# Altium PCB WCAM-BREAKOUT-PCB-R01.PcbDoc (part 1 of 2)
Units mm, origin at the board's own origin, x right, y up, seen from the top; angles counter-clockwise.
Board outline 42.7 x 48.05 mm, 4 copper layers (Top Layer, Mid1, Mid2, Bottom Layer), stack 1.586 mm thick; 121 components, 86 nets, 382 pads, 183 vias.
Unrouted connection lines stored in the file: 147.
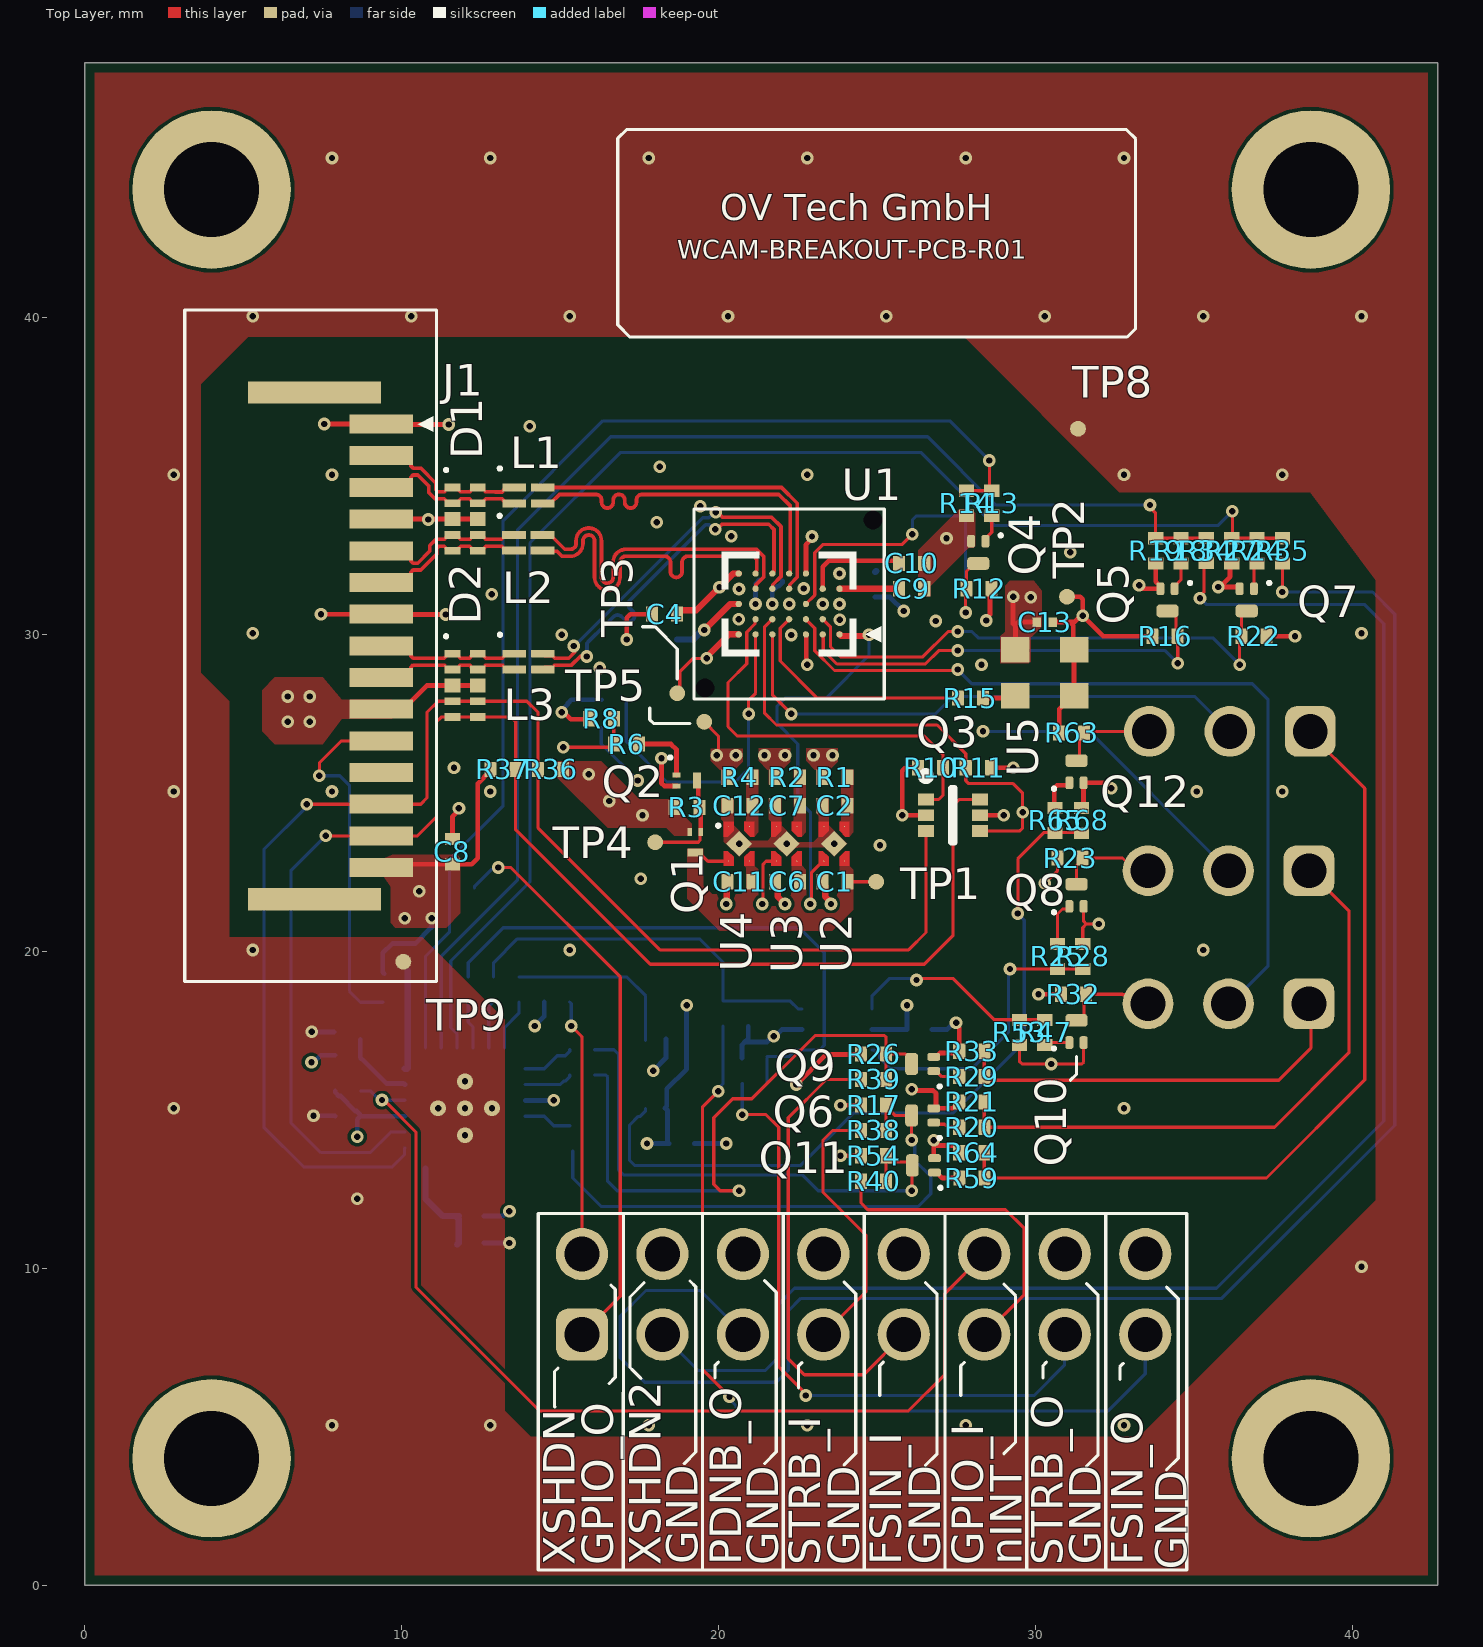
[diagram p0: Top Layer view]
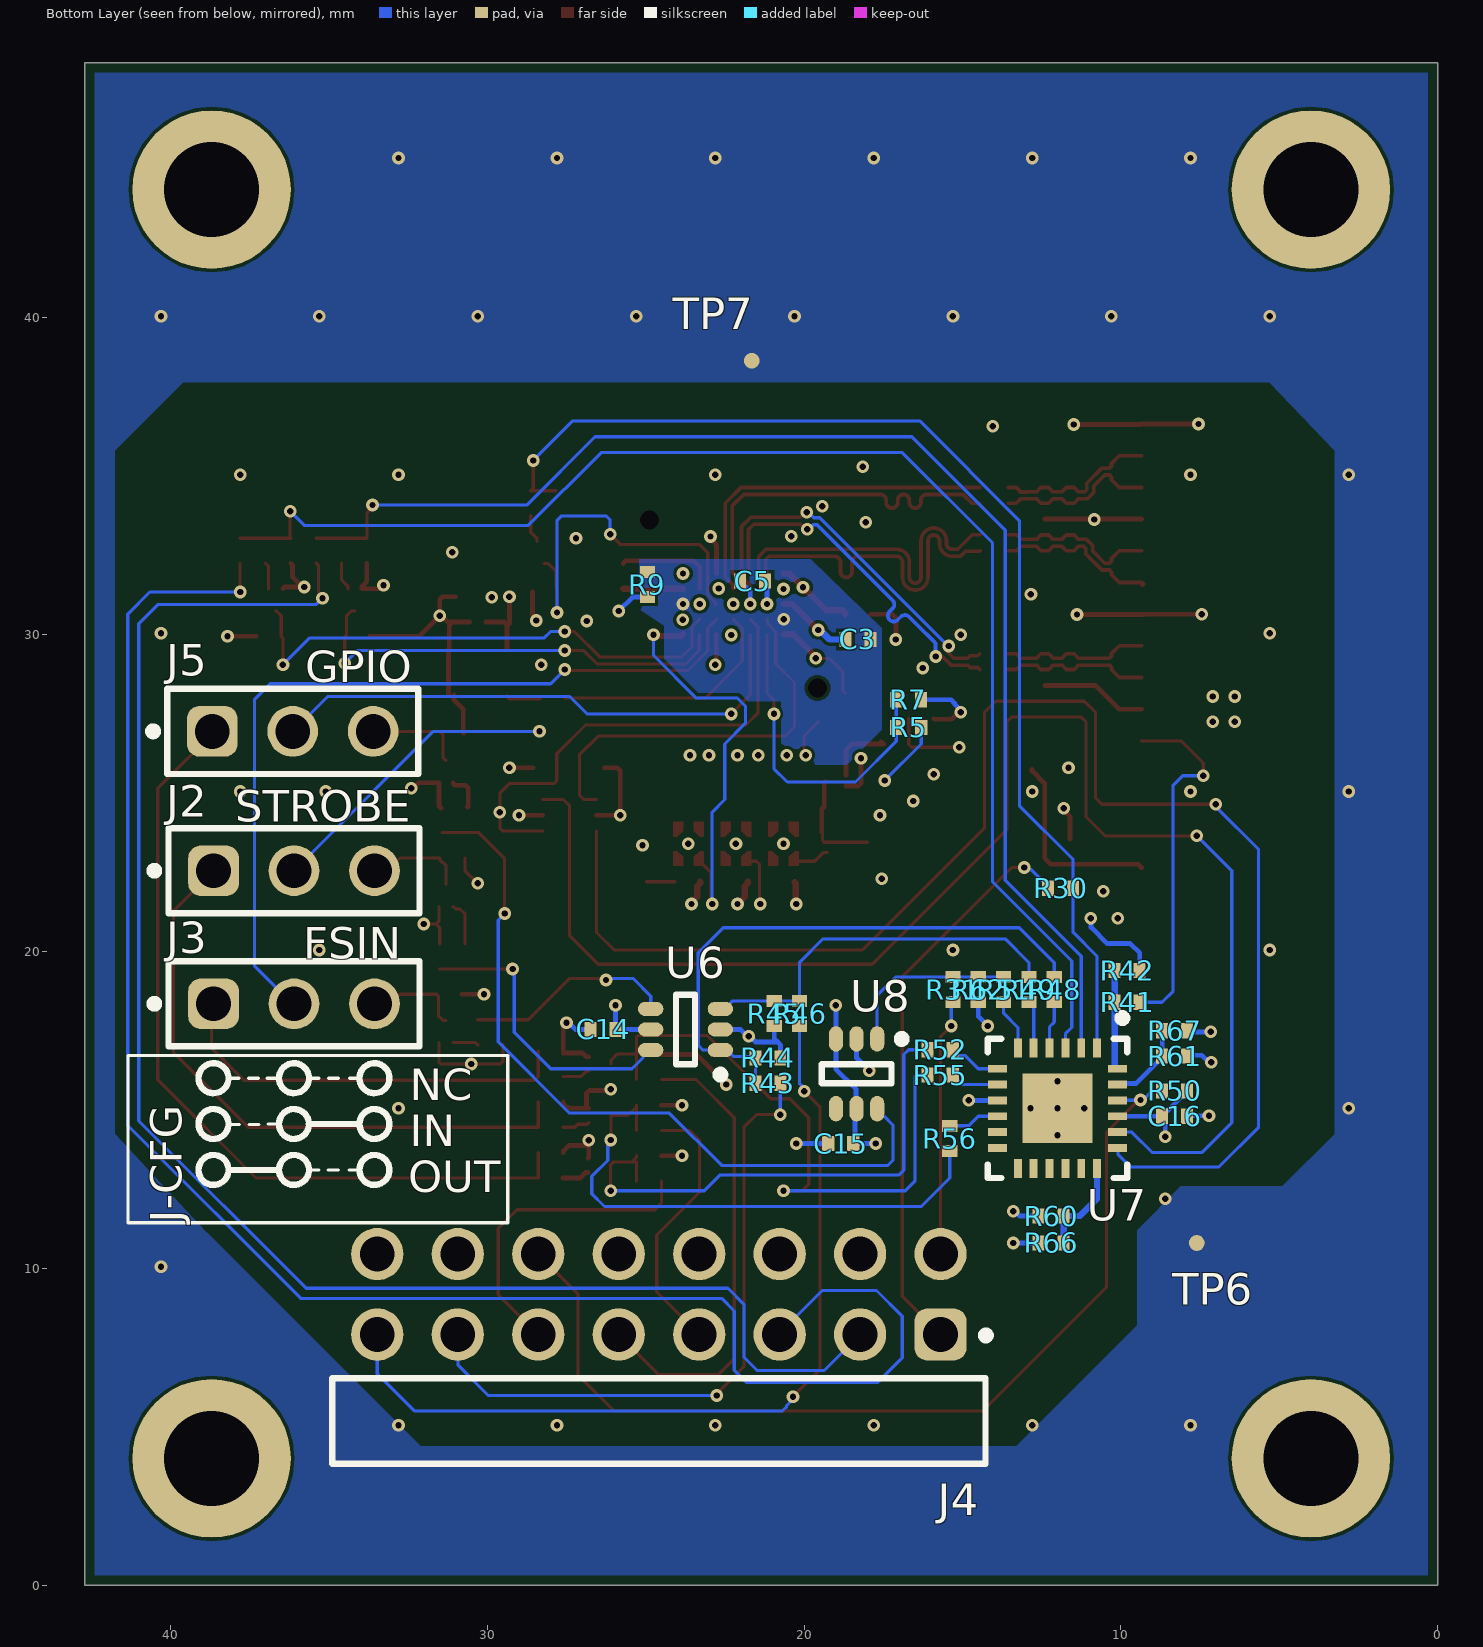
[diagram p1: Bottom Layer view, seen from below]
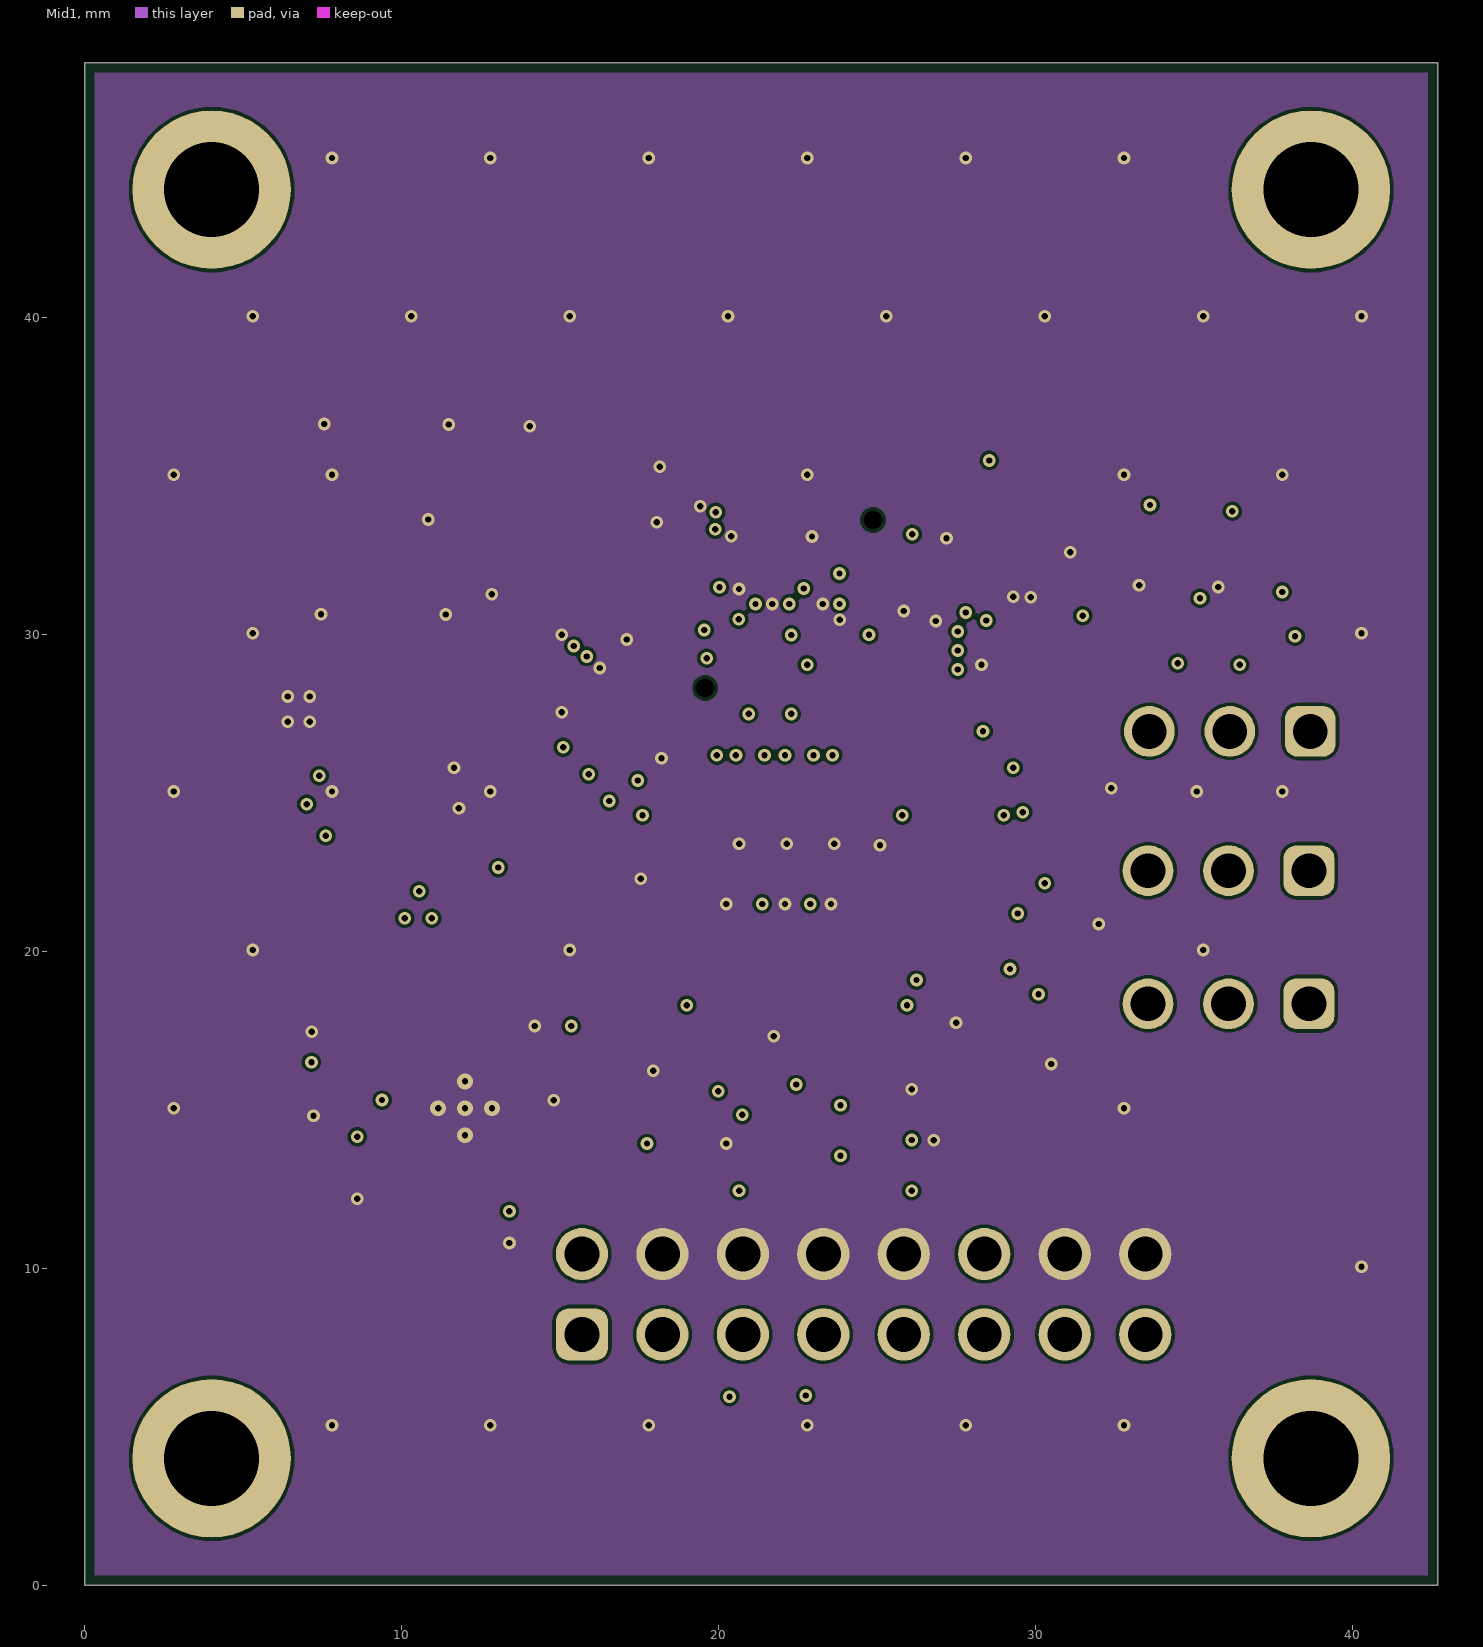
[diagram p2: Mid1]
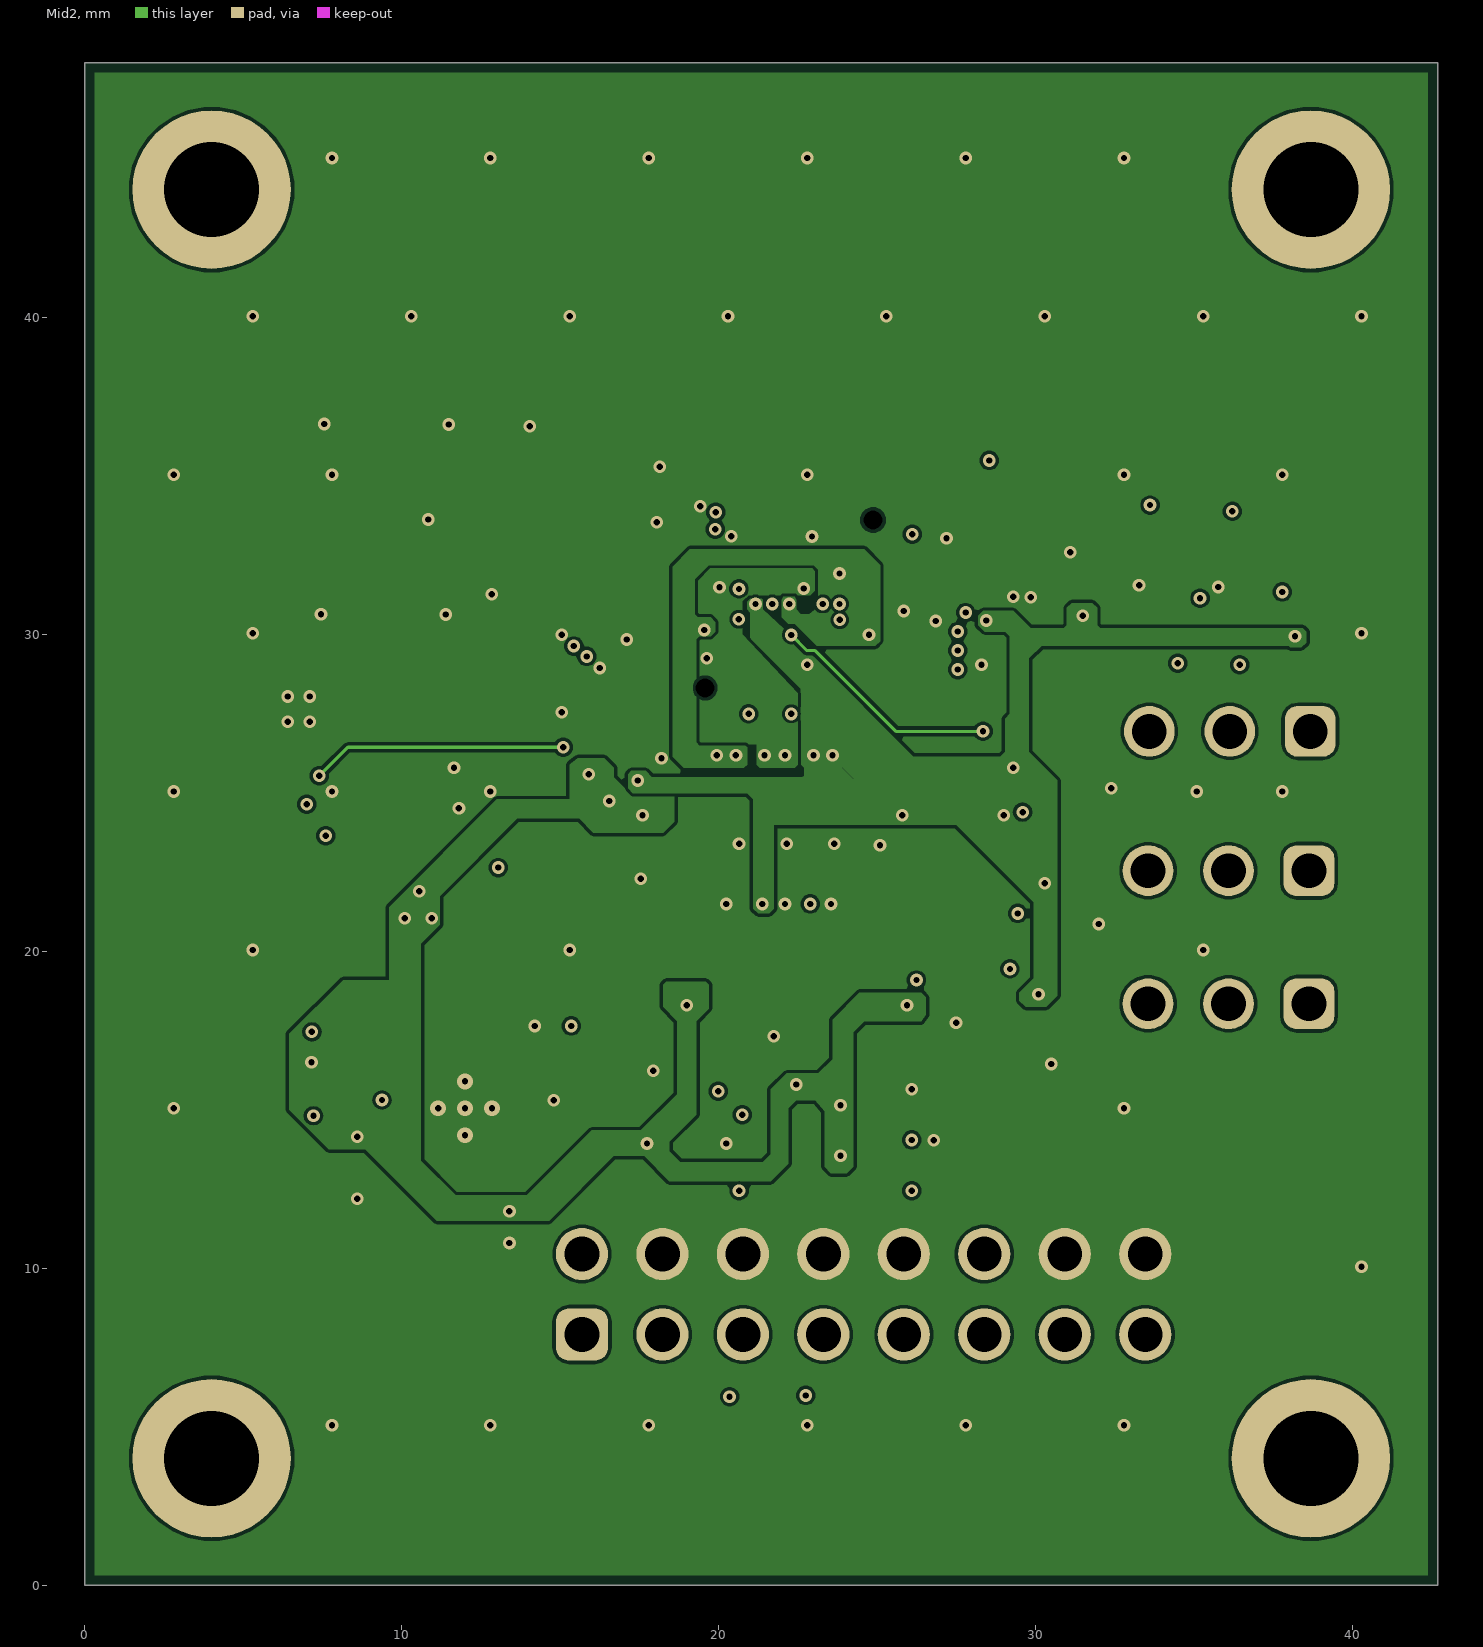
[diagram p3: Mid2]
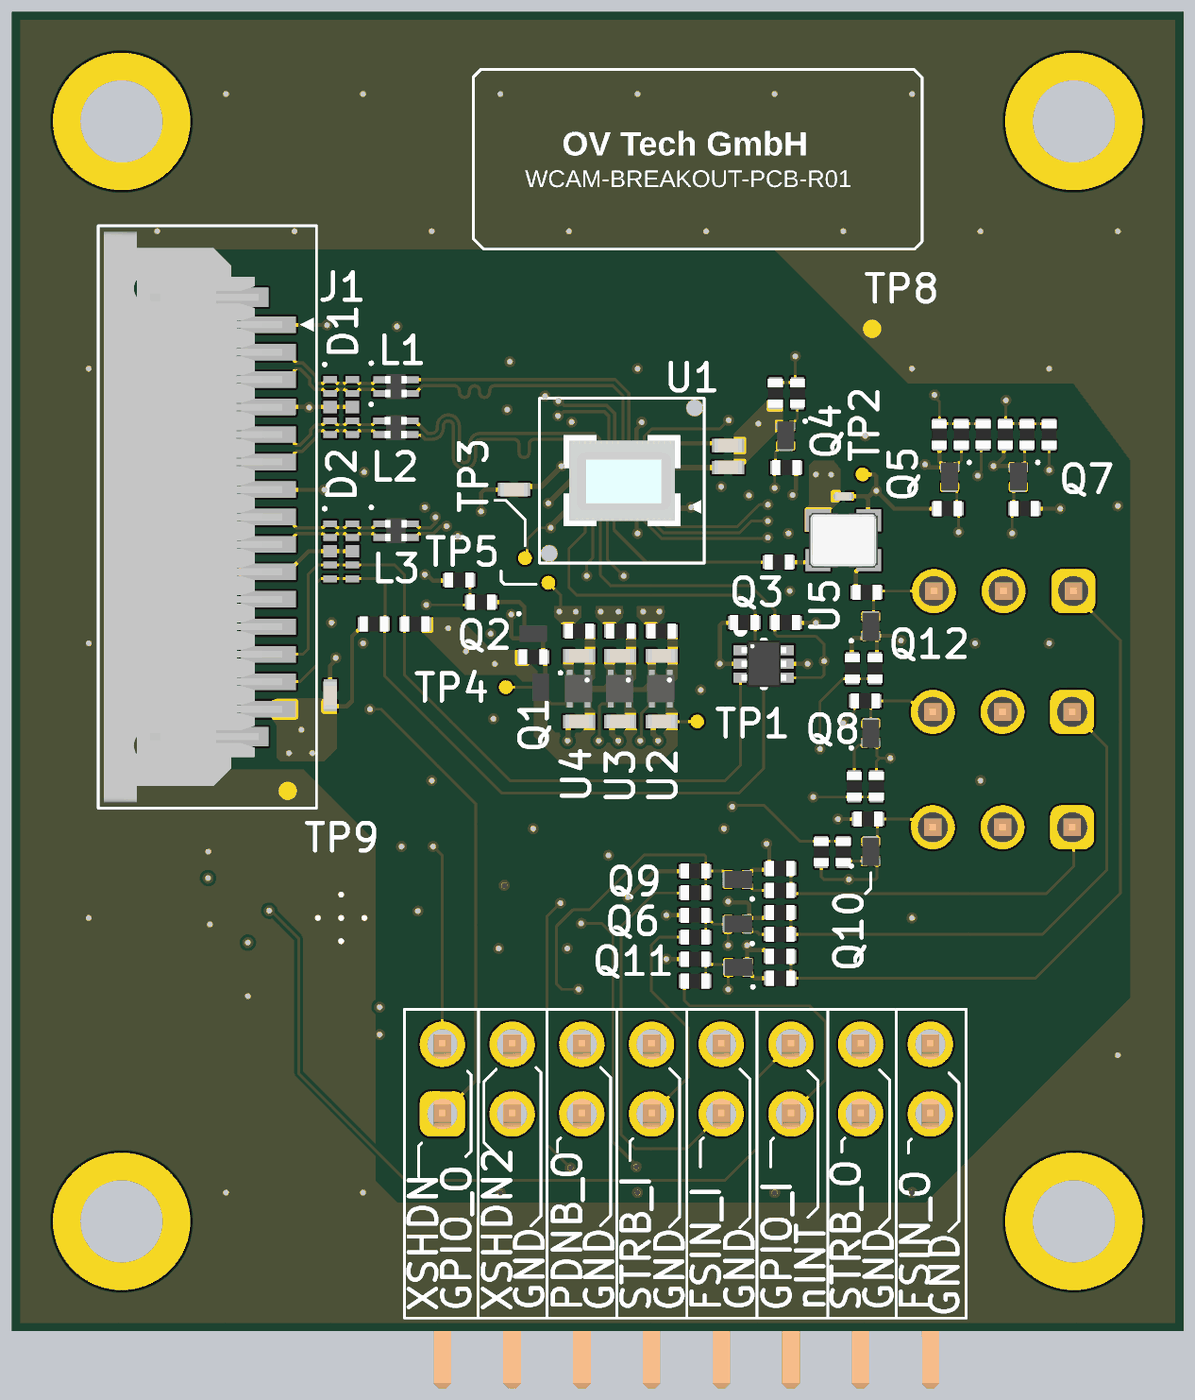
[diagram p5: 3D render of the assembled board from above, using the file's embedded part models]
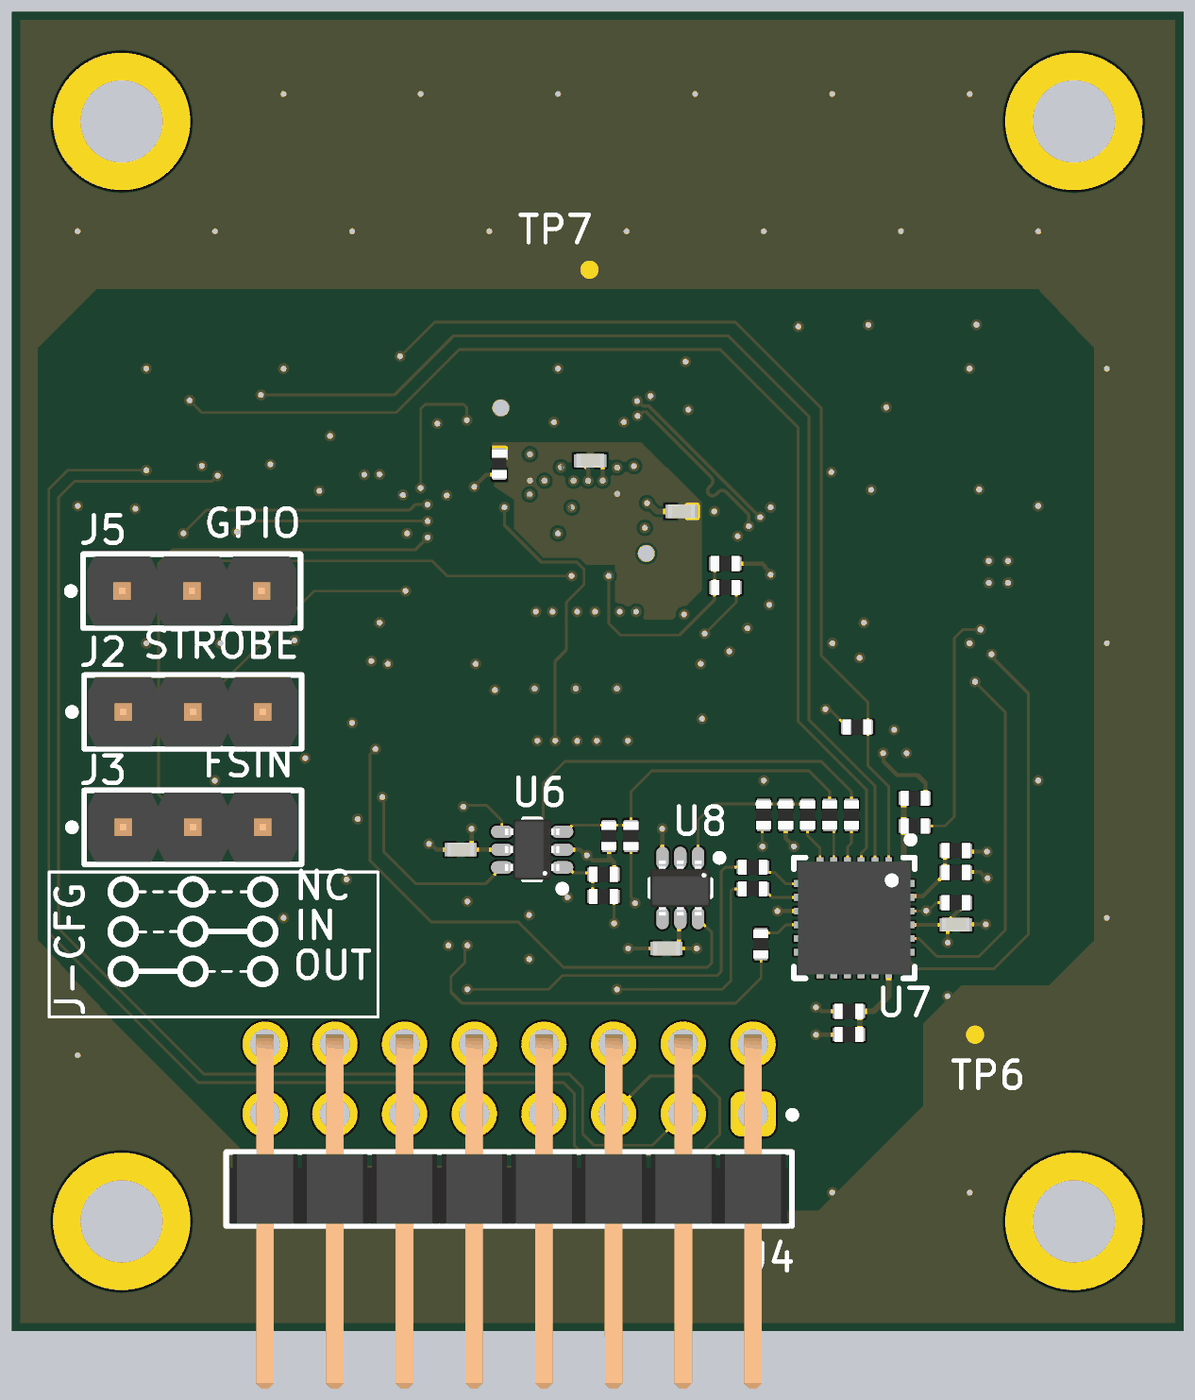
[diagram p6: 3D render of the assembled board from below, using the file's embedded part models]

## Layer stack, top to bottom
Top Solder: solder mask 0.0102, Solder Resist, Dk 3.8
Top Layer: signal copper 0.035
Dielectric 2: prepreg 0.2104, PP-022, Dk 4.4
Mid1: signal copper 0.0152
Dielectric 1: core 1.065, FR-4, Dk 4.6
Mid2: signal copper 0.0152
Dielectric 3: prepreg 0.2104, PP-022, Dk 4.4
Bottom Layer: signal copper 0.035
Bottom Solder: solder mask 0.0102, Solder Resist, Dk 3.8

## Board outline
0,0 0,48.05 42.7,48.05 42.7,0

## Design rules (kind name [scope] priority, off if disabled: settings)
BoardOutlineClearance [All] p1: gap=0.3 ignorepadtopadclearanceinfootprint=FALSE
Clearance [All] p1: gap=0.1 ignorepadtopadclearanceinfootprint=TRUE
ComponentClearance [All] p1: gap=0.1 collisioncheckmode=3 verticalgap=0.254 showdistances=FALSE
DiffPairsRouting [All] p1: maxlimit=0.127 minlimit=0.102 mostfreqgap=0.127 toplayer_maxgap=0.102 toplayer_prefgap=0.102 toplayer_minwidth=0.117 toplayer_maxwidth=0.117 toplayer_prefwidth=0.117 bottomlayer_maxgap=0.102 bottomlayer_prefgap=0.102 bottomlayer_minwidth=0.117 bottomlayer_maxwidth=0.117 bottomlayer_prefwidth=0.117 impedanceprofiledriven=TRUE impedanceprofileid={4F782867-28E3-4210-9EA7-0F3DD76F8741} impedanceprofilevalue=100.000000 maxuncoupledlength=12.7
HoleSize [All] p1: absolutevalues=TRUE maxlimit=6.3 minlimit=0.2 maxpercent=80.000 minpercent=20.000
HoleToHoleClearance [not IsVia] p1: gap=0.5 allowstackedmicrovias=TRUE
MatchedLengths MatchedLengths_CSI [InxSignalClass('All xSignals')] p1: tolerance=25.4 checknetsindiffpair=FALSE checkdiffpairvsdiffpair=TRUE checkxsignals=TRUE checkothers=TRUE usedelayunits=TRUE delaytolerance=2.000000
MinimumAnnularRing [All] p1 off: minimumring=0.15
MinimumSolderMaskSliver [All] p1: minsoldermaskwidth=0.04
PolygonConnect [All] p1: connectstyle=Direct reliefconductorwidth=0.254 reliefentries=4 polygonreliefangle="90 Angle" airgapwidth=0.254
RoutingVias [All] p1: holewidth=0.2 width=0.6 viastyle="Through Hole" minholewidth=0.2 minwidth=0.4 maxholewidth=6.3 maxwidth=0.8
SilkToSilkClearance [All] p1: silktosilkclearance=0.01
SilkToSolderMaskClearance [IsPad] p1: minsilkscreentomaskgap=0 clearancetoexposedcopper=TRUE
SolderMaskExpansion SolderMaskExpansion_Via [isVia] p1: expansion=0.039 istentingtop=FALSE
SolderMaskExpansion [All] p2: expansion=0.08 istentingtop=FALSE
Width [All] p1: maxlimit=10 minlimit=0.1 preferedwidth=0.2
23 further rules are at their usual default settings.

## Classes and differential pairs
differential pair class DIFF100: CON_CSI_CLK CON_CSI_D0 CON_CSI_D1 CSI_CLK CSI_D0 CSI_D1
net class PWR: AGND AVDD DOVDD DVDD NetC1_1 NetC2_1 NetC7_1 VCC3.3
net class LOGIC: /INT_NCA FSIN_1V8__OUT GPIO_1V8__OUT NetJ4_2 PE_IN_FSIN PE_IN_GPIO PE_IN_STROBE PE_OUT_FSIN PE_OUT_FSIN_INV PE_OUT_GPIO PE_OUT_GPIO_INV PE_OUT_PWDNB PE_OUT_STROBE PE_OUT_STROBE_INV PE_OUT_XSHDN PE_OUT_XSHDN2 SNS_PWDNB SNS_XSHDN SNS_XSHDN2 STROBE_1V8__OUT
differential pair CSI_D1: +CSI_D1_P -CSI_D1_N
differential pair CSI_D0: +CSI_D0_P -CSI_D0_N
differential pair CSI_CLK: +CSI_CLK_P -CSI_CLK_N
differential pair CON_CSI_D1: +CON_CSI_D1_P -CON_CSI_D1_N
differential pair CON_CSI_D0: +CON_CSI_D0_P -CON_CSI_D0_N
differential pair CON_CSI_CLK: +CON_CSI_CLK_P -CON_CSI_CLK_N

## Components (designator, comment, footprint, x,y, rotation, side; value= is the part's Value field where it differs from the comment)
C1 "1µF 25V" CAPC1005X06L 23.675,22.2 r180 top
C2 "1µF 25V" CAPC1005X06L 23.675,24.6 r180 top
C3 "1µF 25V" CAPC1005X06L 18.3,29.85 r180 bottom
C4 "470nF 25V" CAPC1005X06L 18.3,30.65 r180 top
C5 "470nF 25V" CAPC1005X06L 21.625,31.695 r0 bottom
C6 "1µF 25V" CAPC1005X06L 22.175,22.2 r180 top
C7 "1µF 25V" CAPC1005X06L 22.175,24.6 r180 top
C8 "1µF 25V" CAPC1005X06L 11.6,23.15 r90 top
C9 "1µF 25V" CAPC1005X06L 26.1,31.45 r0 top
C10 "1µF 25V" CAPC1005X06L 26.1,32.25 r0 top
C11 "1µF 25V" CAPC1005X06L 20.675,22.2 r180 top
C12 "1µF 25V" CAPC1005X06L 20.675,24.6 r180 top
C13 "470nF 10V" CAPC0603X03L 30.3,30.4 r180 top
C14 "1µF 25V" CAPC1005X06L 26.341,17.538 r0 bottom
C15 "1µF 25V" CAPC1005X06L 18.841,13.938 r0 bottom
C16 "1µF 25V" CAPC1005X06L 8.3,14.8 r180 bottom
D1 "ESD7504MUTAG" QFN50P250X100X55-10L 12,33.65 r270 top
D2 "ESD7504MUTAG" QFN50P250X100X55-10L 12,28.4 r270 top
J1 "SFW15R-1STE1LF" "WIRE-TO-BOARD 15POL SFW15R-1STE1LF" 6.6,29.65 r270 top locked
J2 "61300311121" "BOARD TO BOARD Pinheader WE_61300311121" 36.1,22.55 r180 bottom
J3 "61300311121" "BOARD TO BOARD Pinheader WE_61300311121" 36.1,18.35 r180 bottom
J4 "61301621021" "BOARD TO BOARD Pinheader WE_61301621021" 24.58,5.18 r180 bottom
J5 "61300311121" "BOARD TO BOARD Pinheader WE_61300311121" 36.14,26.95 r180 bottom
L1 "90Ohm 100mA" CAF-50P85X64-4N 13.999,34.398 r0 top
L2 "90Ohm 100mA" CAF-50P85X64-4N 13.992,32.902 r0 top
L3 "90Ohm 100mA" CAF-50P85X64-4N 14,29.15 r0 top
Q1 "SSM3J56ACT,L3F" DFN65P100X50-3L 19.268,23.447 r270 top
Q2 "SSM3K15ACT,L3F" DFN65P100X50-3L 19,25.4 r0 top
Q3 "DMG1024UV-7" SOTFL50P162X60-6N 27.4,24.3 r0 top
Q4 "PMZ130UNEYL" DFN65P98X50-3N 28.2,32.625 r270 top
Q5 "PMZ130UNEYL" DFN65P98X50-3N 34.175,31.125 r270 top
Q6 "PMZ130UNEYL" DFN65P98X50-3N 26.47,14.825 r180 top
Q7 "PMZ130UNEYL" DFN65P98X50-3N 36.675,31.125 r270 top
Q8 "PMZ130UNEYL" DFN65P98X50-3N 31.3,21.75 r90 top
Q9 "PMZ130UNEYL" DFN65P98X50-3N 26.47,16.45 r180 top
Q10 "PMZ130UNEYL" DFN65P98X50-3N 31.3,17.45 r90 top
Q11 "PMZ130UNEYL" DFN65P98X50-3N 26.495,13.25 r180 top
Q12 "PMZ130UNEYL" DFN65P98X50-3N 31.3,25.65 r90 top
R1 "0Ohm 1%" RESC1005X04L 23.675,25.5 r0 top
R2 "0Ohm 1%" RESC1005X04L 22.175,25.5 r0 top
R3 "15k 1%" RESC1005X04L 19,24.55 r0 top
R4 "0Ohm 1%" RESC1005X04L 20.675,25.5 r0 top
R5 "1.5k 1%" RESC1005X04L 16.695,27.075 r0 bottom
R6 "240R 1%" RESC1005X04L 17.1,26.55 r0 top
R7 "1.5k 1%" RESC1005X04L 16.705,27.95 r0 bottom
R8 "15k 1%" RESC1005X04L 16.3,27.35 r180 top
R9 "0Ohm 1%" RESC1005X04L 24.944,31.583 r90 bottom
R10 "2.2k 1%" RESC1005X04L 26.695,25.8 r180 top
R11 "2.2k 1%" RESC1005X04L 28.2,25.8 r0 top
R12 "1.5k 1%" RESC1005X04L 28.225,31.45 r0 top
R13 "100R 1%" RESC1005X04L 28.625,34.15 r270 top
R14 "10k 1%" RESC1005X04L 27.825,34.15 r90 top
R15 "27R 1%" RESC1005X04L 27.95,28 r0 top
R16 "1.5k 1%" RESC1005X04L 34.1,29.95 r180 top
R17 "10k 1%" RESC1005X04L 24.895,15.15 r180 top
R18 "100R 1%" RESC1005X04L 34.6,32.65 r270 top
R19 "10k 1%" RESC1005X04L 33.8,32.65 r90 top
R20 "100R 1%" RESC1005X04L 27.995,14.45 r180 top
R21 "10k 1%" RESC1005X04L 27.995,15.25 r0 top
R22 "1.5k 1%" RESC1005X04L 36.9,29.95 r0 top
R23 "1.5k 1%" RESC1005X04L 31.1,22.95 r180 top
R24 "100R 1%" RESC1005X04L 37,32.65 r270 top
R25 "100R 1%" RESC1005X04L 30.7,19.845 r90 top
R26 "10k 1%" RESC1005X04L 24.895,16.76 r180 top
R27 "10k 1%" RESC1005X04L 36.2,32.65 r90 top
R28 "10k 1%" RESC1005X04L 31.5,19.845 r270 top
R29 "100R 1%" RESC1005X04L 27.995,16.05 r180 top
R30 "0Ohm 1%" RESC1005X04L 11.9,22 r0 bottom
R31 "0Ohm 1%" RESC1005X04L 15.3,18.8 r90 bottom
R32 "1.5k 1%" RESC1005X04L 31.2,18.65 r180 top
R33 "10k 1%" RESC1005X04L 27.995,16.85 r0 top
R34 "0Ohm 1%" RESC1005X04L 35.4,32.655 r270 top
R35 "0Ohm 1%" RESC1005X04L 37.8,32.65 r270 top
R36 "10k 1%" RESC1005X04L 14.7,25.75 r0 top
R37 "10k 1%" RESC1005X04L 13.195,25.75 r180 top
R38 "0Ohm 1%" RESC1005X04L 24.895,14.35 r180 top
R39 "0Ohm 1%" RESC1005X04L 24.895,15.96 r180 top
R40 "0Ohm 1%" RESC1005X04L 24.895,12.75 r180 top
R41 "10k 1%" RESC1005X04L 9.8,18.4 r180 bottom
R42 "10k 1%" RESC1005X04L 9.8,19.4 r180 bottom
R43 "0Ohm 1%" RESC1005X04L 21.141,15.838 r180 bottom
R44 "47k 1%" RESC1005X04L 21.141,16.638 r0 bottom
R45 "47k 1%" RESC1005X04L 20.941,18.038 r90 bottom
R46 "0Ohm 1%" RESC1005X04L 20.141,18.038 r270 bottom
R47 "100R 1%" RESC1005X04L 30.3,17.45 r270 top
R48 "200 1%" RESC1005X04L 12.1,18.8 r90 bottom
R49 "200 1%" RESC1005X04L 12.9,18.8 r90 bottom
R50 "10k 1%" RESC1005X04L 8.3,15.6 r0 bottom
R51 "200 1%" RESC1005X04L 13.7,18.8 r90 bottom
R52 "200 1%" RESC1005X04L 15.7,16.9 r0 bottom
R53 "10k 1%" RESC1005X04L 29.5,17.45 r90 top
R54 "10k 1%" RESC1005X04L 24.895,13.55 r180 top
R55 "200 1%" RESC1005X04L 15.7,16.1 r0 bottom
R56 "200 1%" RESC1005X04L 15.4,14.095 r270 bottom
R59 "100R 1%" RESC1005X04L 28,12.85 r180 top
R60 "0Ohm 1%" RESC1005X04L 12.2,11.65 r0 bottom
R61 "0Ohm 1%" RESC1005X04L 8.3,16.7 r180 bottom
R62 "47k 1%" RESC1005X04L 14.5,18.8 r90 bottom
R63 "1.5k 1%" RESC1005X04L 31.15,26.9 r180 top
R64 "10k 1%" RESC1005X04L 27.995,13.65 r0 top
R65 "100R 1%" RESC1005X04L 30.623,24.137 r90 top
R66 "0Ohm 1%" RESC1005X04L 12.2,10.8 r180 bottom
R67 "0Ohm 1%" RESC1005X04L 8.3,17.5 r0 bottom
R68 "10k 1%" RESC1005X04L 31.461,24.137 r270 top
TP1 "Testpoint 0.5mm" TP_0.50mm 24.975,22.2 r0 top
TP2 "Testpoint 0.5mm" TP_0.50mm 31,31.2 r90 top
TP3 "Testpoint 0.5mm" TP_0.50mm 18.7,28.15 r90 top
TP4 "Testpoint 0.5mm" TP_0.50mm 18,23.45 r270 top
TP5 "Testpoint 0.5mm" TP_0.50mm 19.55,27.25 r90 top
TP6 "Testpoint 0.5mm" TP_0.50mm 7.6,10.8 r90 bottom
TP7 "Testpoint 0.5mm" TP_0.50mm 21.65,38.65 r90 bottom
TP8 "Testpoint 0.5mm" TP_0.50mm 31.35,36.5 r90 top
TP9 "Testpoint 0.5mm" TP_0.50mm 10.053,19.675 r90 top
U1 "OV02740-H34A-Z" BGA34C53P7X5_386X292X388 22.23,30.97 r180 top
U2 "TLV74018PDQNR" X2SON-DFN 23.65,23.4 r270 top
U3 "TLV74012PDQNR" X2SON-DFN 22.15,23.4 r270 top
U4 "TLV74028PDQNR" X2SON-DFN 20.65,23.4 r270 top
U5 "ECS-2520MV-240-BN-TR" Oscillator_ECS-2520MV 30.3,28.8 r180 top
U6 "74HC2G14GW-Q100" TSOP65P210X110-6N 23.741,17.538 r0 bottom
U7 "TCAL9539RTWR" QFN50P400X400X80_HS-25M 12,15.05 r270 bottom
U8 "74HC2G14GW-Q100" TSOP65P210X110-6N 18.341,16.138 r270 bottom

## Footprints (in the part's own frame and the unit in brackets; to place one, negate y for a bottom-side part, rotate by r counter-clockwise, add the part's x,y. Pads: shape width x height; smd on the part's side, far side on the other; paste and mask are expansions set on the pad)
BGA34C53P7X5_386X292X388 [mm] "BGA, 34-Leads, Body 3,86x2,92mmx3,88mm, Pitch 0,53mm"
  round 0.2 smd: A1(-1.59,0.96) A2(-1.06,0.96) A3(-0.53,0.96) A4(0,0.96) A5(0.53,0.96) A6(1.06,0.96) A7(1.59,0.96) B1(-1.59,0.48) B2(-1.06,0.48) B3(-0.53,0.48) B4(0,0.48) B5(0.53,0.48) B6(1.06,0.48) B7(1.59,0.48) C1(-1.59,0) C2(-1.06,0) C3(-0.53,0) C4(0,0) C5(0.53,0) C6(1.06,0) C7(1.59,0) D1(-1.59,-0.48) D2(-1.06,-0.48) D3(-0.53,-0.48) D4(0,-0.48) D5(0.53,-0.48) D6(1.06,-0.48) D7(1.59,-0.48) E1(-1.59,-0.96) E3(-0.53,-0.96) E4(0,-0.96) E5(0.53,-0.96) E6(1.06,-0.96) E7(1.59,-0.96)
  silkscreen extent -2.9,0.7 -2.4,1.2, body extent -1.93,-1.46 1.93,1.46, height 0.72
"BOARD TO BOARD Pinheader WE_61300311121" [mm] "Pin Header, pitch 2.54 mm, THT, Vertical, single row, 3p"
  rrect50% 1.6x1.6 hole 1.1: 1(-2.54,0)
  round 1.6 hole 1.1: 2(0,0) 3(2.54,0)
  silkscreen extent -4.53,-1.35 3.96,1.35, body extent -3.81,-1.27 3.81,1.27, height 8.57
"BOARD TO BOARD Pinheader WE_61301621021" [mm] "Pin Header, pitch 2.54 mm, THT, Angled, dual row, 16p"
  rrect50% 1.65x1.65 hole 1.1: 1(8.89,2.73)
  round 1.65 hole 1.1: 2(8.89,5.27) 3(6.35,2.73) 4(6.35,5.27) 5(3.81,2.73) 6(3.81,5.27) 7(1.27,2.73) 8(1.27,5.27) 9(-1.27,2.73) 10(-1.27,5.27) 11(-3.81,2.73) 12(-3.81,5.27) 13(-6.35,2.73) 14(-6.35,5.27) 15(-8.89,2.73) 16(-8.89,5.27)
  silkscreen extent -10.31,-1.35 10.44,2.82, body extent -10.16,-7.27 10.16,5.63, height 5.12
CAF-50P85X64-4N [mm] "Chip Array, Flat, 4-Leads, Pitch 0,50mm,  Body 0,85x0,65mm,  IPC Medium Density"
  rect 0.75x0.25 smd: 1(-0.45,0.25) 2(0.45,0.25) 3(0.45,-0.25) 4(-0.45,-0.25)
  silkscreen extent -0.95,0.8 -0.85,0.9, body extent -0.4,-0.45 0.4,0.45, height 0.5
CAPC0603X03L [mm] "Chip Capacitor, 2-Leads, Body 0,60x0,30mm, IPC High Density"
  rect 0.27x0.3 smd paste-0.5: 1(-0.25,0) 2(0.25,0)
  body extent -0.3,-0.15 0.3,0.15, height 0.3
CAPC1005X06L [mm] "Chip Capacitor, 2-Leads, Body 1,00x0,50mm, IPC High Density"
  rect 0.38x0.48 smd: 1(-0.395,0) 2(0.395,0)
  body extent -0.5,-0.25 0.5,0.25, height 0.5
DFN65P98X50-3N [mm] "DFN, 3-Leads, Body 0,59x0,99mm, Pitch 0,65mm, IPC Medium Density"
  rrect50% 0.4x0.25 smd paste-2539.97 mask-2539.97: 1(-0.325,0.225) 2(-0.325,-0.225)
  rrect50% 0.4x0.7 smd paste-2539.97 mask-2539.97: 3(0.375,0)
  silkscreen extent -0.56,0.66 -0.46,0.76, body extent -0.51,-0.31 0.51,0.31, height 0.5
DFN65P100X50-3L [mm] "DFN, 3-Leads, Body 0,60x1,00mm, Pitch 0,65mm, IPC High Density"
  rect 0.25x0.15 smd paste-2539.97 mask+0.05: 1(-0.325,0.175) 2(-0.325,-0.175)
  rect 0.25x0.5 smd paste-2539.97 mask+0.05: 3(0.325,0)
  silkscreen extent -0.57,0.68 -0.48,0.77, body extent -0.5,-0.3 0.5,0.3, height 0.38
Oscillator_ECS-2520MV [mm] "miniature SMD HCMOS Oscillator with MultiVolt capability"
  rect 0.9x0.8 smd: 1(-0.925,-0.725) 2(0.925,-0.725) 3(0.925,0.725) 4(-0.925,0.725)
  body extent -1.25,-1 1.25,1, height 0.9
QFN50P250X100X55-10L [mm] "QFN, 10-Leads, Body 2,50x1,00mm, Pitch 0,50mm, IPC High Density"
  rect 0.25x0.5 smd: 1(-1,-0.4) 2(-0.5,-0.4) 4(0.5,-0.4) 5(1,-0.4) 6(1,0.4) 7(0.5,0.4) 9(-0.5,0.4) 10(-1,0.4)
  rect 0.45x0.5 smd: 3(0,-0.4) 8(0,0.4)
  silkscreen extent -1.6,-0.65 -1.5,-0.55, body extent -1.25,-0.5 1.25,0.5, height 0.55
QFN50P400X400X80_HS-25M [mm] "QFN, 24-Leads, Body 4,00x4,00mm, Pitch 0,50mm, Thermal Pad 3,50x3,50mm, IPC Low Density"
  rect 0.6x0.25 smd mask+0.07: 1(-1.9,1.25) 2(-1.9,0.75) 3(-1.9,0.25) 4(-1.9,-0.25) 5(-1.9,-0.75) 6(-1.9,-1.25) 13(1.9,-1.25) 14(1.9,-0.75) 15(1.9,-0.25) 16(1.9,0.25) 17(1.9,0.75) 18(1.9,1.25)
  rect 0.25x0.6 smd mask+0.07: 7(-1.25,-1.9) 8(-0.75,-1.9) 9(-0.25,-1.9) 10(0.25,-1.9) 11(0.75,-1.9) 12(1.25,-1.9) 19(1.25,1.9) 20(0.75,1.9) 21(0.25,1.9) 22(-0.25,1.9) 23(-0.75,1.9) 24(-1.25,1.9)
  rect 2.2x2.2 smd mask+0.07: 25(0,0)
  silkscreen extent -2.97,-2.2 2.2,2.2, body extent -2.05,-2.05 2.05,2.05, height 0.8
RESC1005X04L [mm] "Chip Resistor, 2-Leads, Body 1,00x0,53mm, IPC High Density"
  rect 0.38x0.48 smd: 1(-0.395,0) 2(0.395,0)
  body extent -0.52,-0.27 0.53,0.28, height 0.4
SOTFL50P162X60-6N [mm] "SOTFL, 6-Leads, Body 1,60x1,63mm, Pitch 0,50mm, IPC Medium Density"
  rect 0.5x0.375 smd: 1(-0.85,0.5) 2(-0.85,0) 3(-0.85,-0.5) 4(0.85,-0.5) 5(0.85,0) 6(0.85,0.5)
  silkscreen extent -0.97,-0.85 0.05,1.36, body extent -0.81,-0.85 0.81,0.85, height 0.6
TP_0.50mm [mm] "Testpoint 0.50mm diameter"
  round 0.5 smd paste-1: TP(0,0)
  body extent -0.2,-0.2 0.2,0.2, height 0.1
TSOP65P210X110-6N [mm] "TSOP, 6-Leads, Body 2,00x1,25mm, Pitch 0,65mm, IPC Medium Density"
  oval 0.8x0.45 smd: 1(-1.1,0.65) 2(-1.1,0) 3(-1.1,-0.65) 4(1.1,-0.65) 5(1.1,0) 6(1.1,0.65)
  silkscreen extent -1.22,-1.1 0.3,1.55, body extent -1.04,-1.1 1.04,1.1, height 1.1
"WIRE-TO-BOARD 15POL SFW15R-1STE1LF" [mm] "AMPHENOL ICC - SFW15R-1STE1LF - CONN, FFC/FPC, RCPT, 15POS, 1MM, SMT"
  rect 0.6x2 smd: 1(-7,2.75) 2(-6,2.75) 3(-5,2.75) 4(-4,2.75) 5(-3,2.75) 6(-2,2.75) 7(-1,2.75) 8(0,2.75) 9(1,2.75) 10(2,2.75) 11(3,2.75) 12(4,2.75) 13(5,2.75) 14(6,2.75) 15(7,2.75)
  rect 0.7x4.2 smd: MT(-8,0.65) MT(8,0.65)
  silkscreen extent -10.6,-3.45 10.6,4.5, body extent -10.4,-3.25 10.4,3.25, height 2.7
X2SON-DFN [mil] "X2SON small outline to lead"
  round 1 smd paste-99999 mask-99999: 1(-21.63,12.8) 2(-21.63,-12.8) 3(21.63,-12.8) 4(21.63,12.8)
  rect 22.83x22.83 smd rot 45 paste-99999 mask-99999: 5(0,0)
  Top Layer region: -27.14,18.9 -27.14,6.69 -16.32,6.69 -9.03,13.98 -9.03,18.9
  Top Layer region: 27.14,18.9 27.14,6.69 16.32,6.69 9.03,13.98 9.03,18.9
  Top Layer region: -27.14,-18.9 -27.14,-6.69 -16.32,-6.69 -9.03,-13.98 -9.03,-18.9
  Top Layer region: 27.14,-18.9 27.14,-6.69 16.32,-6.69 9.03,-13.98 9.03,-18.9
  body extent -20,-20 20,20, height 18

## Part data
C1 C2 C3 C6 C7 C8 C9 C10 C11 C12 C14 C15 C16: library part CAP_0402_1µ_25V, "Multilayer Ceramic Capacitors MLCC - SMD/SMT 0402 25VDC", Manufacturer 1="Murata Electronics", Manufacturer 1 Prt. Nr.=GRM155R61E105KE11D, Manufacturer 2=Walsin, Manufacturer 2 Prt. Nr.=0402X105K250CT
C4 C5: library part CAP_0402_470n_25V, "Multilayer Ceramic Capacitors MLCC - SMD/SMT 0402 25VDC", Manufacturer 1="Murata Electronics", Manufacturer 1 Prt. Nr.=GRM155R61E474KE01D, Manufacturer 2=Walsin, Manufacturer 2 Prt. Nr.=0603X474K250CT
C13: library part CAP_0201_470nF_10V, "Multilayer Ceramic Capacitors MLCC - SMD/SMT 0201 10VDC", Manufacturer 1="Taiyo Yuden", Manufacturer 1 Prt. Nr.=LMK063BBJ474KPLF, Manufacturer 2=TDK, Manufacturer 2 Prt. Nr.=C0603X5R1A474M030BC
D1 D2: library part "ESD Protection Diode_ESD7504MUTAG", "ESD-Entstörer/TVS-Dioden LOW CAP ESD Protection", Manufacturer 1=onsemi, Manufacturer 1 Prt. Nr.=ESD7504MUTAG
J1: library part "Wire to Board Connector_15pol_SFW15R-1STE1LF", "Wire to Board Connector 15pol 1.0mm Pitch", Manufacturer 1="Amphenol FCI", Manufacturer 1 Prt. Nr.=SFW15R-1STE1LF
J2 J3 J5: library part "Pin Header_3pol_61300311121", "Pin Header 3 Pol 2.54mm", Manufacturer 1="Würth elektronik", Manufacturer 1 Prt. Nr.=61300311121
J4: library part "Pin Header_16pol_61301621021", "Pin Header 3 Pol 2.54mm", Manufacturer 1="Würth elektronik", Manufacturer 1 Prt. Nr.=61301621021
L1 L2 L3: library part "Common Mode Choke_LM0NSM900HY2#", "Murata Common Mode Choke 90Ohm 100mA for ,USB2.0,USB3.1 Gen1,USB3.1 Gen2,MIPI D-PHY Ver1.1,MIPI D-PHY Ver1.2,HDMI 1.4b", Manufacturer 1="Murata Electronics", Manufacturer 1 Prt. Nr.=DLM0NSM900HY2D
Q1: library part "P-Channel MOSFET_SSM3J56ACT,L3F", "MOSFET 20V SGL P-CH TRENCHMOS Logic Level", Manufacturer 1=Toshiba, Manufacturer 1 Prt. Nr.=SSM3J56ACT,L3F
Q2: library part "N-Channel MOSFET_SSM3K15ACT,L3F", "MOSFET 30V SGL N-CH TRENCHMOS Logic Level", Manufacturer 1=Toshiba, Manufacturer 1 Prt. Nr.=SSM3K15ACT,L3F
Q3: library part "N-Channel DMG1024UV", "Dual N-Channel MOSFET", Manufacturer 1="Diodes Incorporated", Manufacturer 1 Prt. Nr.=DMG1024UV-7
Q4 Q5 Q6 Q7 Q8 Q9 Q10 Q11 Q12: library part "N-Channel MOSFET_PMZ130UNEYL", "MOSFET PMZ130UNE/SOT883/XQFN3", Manufacturer 1=Nexperia, Manufacturer 1 Prt. Nr.=PMZ130UNEYL
R1 R2 R4 R9 R30 R31 R34 R35 R38 R39 R40 R43 R46 R60 R61 R66 R67: library part RES_0402_0R_1%, "Thick Film Resistors - SMD 0OHM 1%", Manufacturer 1=Bourns, Manufacturer 1 Prt. Nr.=CR0402AJ/-000GAS, Manufacturer 2=YAGEO, Manufacturer 2 Prt. Nr.=AC0402FR-070RL
R3 R8: library part RES_0402_15k_1%, "Thick Film Resistors - SMD 15k 1%", Manufacturer 1="Vishay / Dale", Manufacturer 1 Prt. Nr.=CRCW040215K0FKED, Manufacturer 2=YAGEO, Manufacturer 2 Prt. Nr.=RT0402FRE0715KL
R5 R7 R12 R16 R22 R23 R32 R63: library part RES_0402_1.5k_1%, "Thick Film Resistors - SMD 1.5k 1%", Manufacturer 1="Vishay / Dale", Manufacturer 1 Prt. Nr.=CRCW04021K50FKED, Manufacturer 2=YAGEO, Manufacturer 2 Prt. Nr.=RC0402FR-131K5L
R6: library part RES_0402_240R_1%, "Thick Film Resistors - SMD 240R 1%", Manufacturer 1="Vishay / Dale", Manufacturer 1 Prt. Nr.=CRCW0402240RFKEDC, Manufacturer 2=YAGEO, Manufacturer 2 Prt. Nr.=RC0402FR-13240RL
R10 R11: library part RES_0402_2.2k_1%, "Thick Film Resistors - SMD 2.2k 1%", Manufacturer 1="Vishay / Dale", Manufacturer 1 Prt. Nr.=CRCW04022K20FKED, Manufacturer 2=Panasonic, Manufacturer 2 Prt. Nr.=ERJ-2RKF2201X
R13 R18 R20 R24 R25 R29 R47 R59 R65: library part RES_0402_100R_1%, "Thick Film Resistors - SMD 100R 1%", Manufacturer 1="Vishay / Dale", Manufacturer 1 Prt. Nr.=CRCW0402100RFKEDC, Manufacturer 2=YAGEO, Manufacturer 2 Prt. Nr.=RC0402FR-07100RL
R14 R17 R19 R21 R26 R27 R28 R33 R36 R37 R41 R42 R50 R53 R54 R64 R68: library part RES_0402_10k_1%, "Thick Film Resistors - SMD 10k 1%", Manufacturer 1="Vishay / Dale", Manufacturer 1 Prt. Nr.=CRCW040210K0FKEDC, Manufacturer 2=YAGEO, Manufacturer 2 Prt. Nr.=RT0402FRE0710KL
R15: library part RES_0402_27R_1%, "Thick Film Resistors - SMD 27R 1%", Manufacturer 1=YAGEO, Manufacturer 1 Prt. Nr.=RC0402FR-0727RL, Manufacturer 2="TE Connectivity Passive Product", Manufacturer 2 Prt. Nr.=CRGCQ0402F27R
R44 R45 R62: library part RES_0402_47k_1%, "Thick Film Resistors - SMD 47k 1%", Manufacturer 1="Vishay / Dale", Manufacturer 1 Prt. Nr.=CRCW040247K0FKEDC, Manufacturer 2=YAGEO, Manufacturer 2 Prt. Nr.=RT0402FRE0747KL
R48 R49 R51 R52 R55 R56: library part RES_0402_200_1%, "Thick Film Resistors - SMD 200 1%", Manufacturer 1=Panasonic, Manufacturer 1 Prt. Nr.=ERJ-2RKF2000X, Manufacturer 2=Bourns, Manufacturer 2 Prt. Nr.=CR0402-FX-2000GLF
U1: library part "Image Sensor_OV2740", "MIPI CSI Image Sensor 1080p 1/6\"", Manufacturer 1 Prt. Nr.=OmniVision, Manufacturer 1=OV02740-H34A-Z
U2: library part "LDO 1.8V_TLV74018PDQNR", "LDO voltage regulator 300mA X2SON", Manufacturer 1="Texas Instruments", Manufacturer 1 Prt. Nr.=TLV74018PDQNR
U3: library part "LDO 1.2V_TLV74012PDQNR", "LDO voltage regulator 300mA X2SON", Manufacturer 1="Texas Instruments", Manufacturer 1 Prt. Nr.=TLV74012PDQNR
U4: library part "LDO 2.8V_TLV74028PDQNR", "LDO voltage regulator 300mA X2SON", Manufacturer 1="Texas Instruments", Manufacturer 1 Prt. Nr.=TLV74028PDQNR
U5: library part "Crystal Oscillator_ECS-2520MV-240-BN-TR", "Crystal Oscillator 2520 miniature SMD package", Manufacturer 1=ECS, Manufacturer 1 Prt. Nr.=ECS-2520MV-240-BN-TR
U6 U8: library part "Dual inverting Schmitt trigger 74HC2G14GW-Q100", "Schmitt Trigger Inverter, 1I/P, 125Deg C Rohs Compliant: Yes", Manufacturer 1=Nexperia, Manufacturer 1 Prt. Nr.=74HC2G14GW-Q100
U7: library part "SMBus I/O expander_TCAL9539RTWR", "TCAL9539 Low-Voltage 16-Bit I2C-Bus, SMBus I/O Expander with Interrupt Output, / Reset, and Configuration Registers", Manufacturer 1="Texas Instruments", Manufacturer 1 Prt. Nr.=TCAL9539RTWR

## Free pads (board coordinates)
  round 0 hole 0.6: 2(19.58,28.32) 2(24.88,33.62)
  round 5 hole 3: MNT(4,4) MNT(4,44.05) MNT(38.7,4) MNT(38.7,44.05)

## Via types
v1: diameter 0.4, hole 0.2, Top Layer to Bottom Layer, tented both sides, 178 vias
v2: diameter 0.5, hole 0.2, Top Layer to Bottom Layer, tented both sides, 5 vias

## Nets (pads, with @x,y where several pads share a name; then routed paths per layer and width w, separated by ;. In a path a pad name is that pad's centre, name@x,y a point inside that pad or via, vN(x,y) a via of type N, cw(c..) or ccw(c..) an arc to the next point about the centre after c; other vN are vias at no path point)
/INT_NCA: J4.12 R50.2 U7.22 | length 31
  Top Layer w0.1: v1@9.4,15.35 10.45,14.3 10.45,9.4 14.35,5.5 25.999,5.5 27.139,6.64 27.139,9.199 J4.12@28.39,10.45
  Bottom Layer w0.1: R50.2@8.695,15.6 9.008,15.6 9.297,15.311 v1(9.378,15.311) 9.384,15.306 10.094,15.306 U7.22@10.1,15.3
/RESET: R41.1 R42.1 U7.24 | length 3.2
  Bottom Layer w0.2: U7.24@10.1,16.3 10.17,16.3 10.195,16.325 R41.1@10.195,18.4 R42.1@10.195,19.4
A0: R60.1 R66.2 U7.18 | length 3.1
  Bottom Layer w0.2: U7.18@10.75,13.15 10.75,12.2 11.3,11.65 R60.1@11.805,11.65 ; R66.2@11.75,10.75 11.805,10.805 11.805,11.545 R60.1@11.75,11.6
A1: R61.1 R67.2 U7.23 | length 2.3
  Bottom Layer w0.15: 8.695,17.225 8.695,16.65 8.81,16.535 8.816,16.535 9.517,15.834 10.066,15.834 U7.23@10.1,15.8
AGND: C3.2 R9.2 U1.B7 U1.C1 | length 0
  Bottom Layer w0.2: R9.2@24.944,31.978 R9.2@24.977,32.01
  other v1: 20.64,30.49 23.82,30.97
AVDD: C3.1 R4.1 TP5.TP U1.A1 U1.C4 U1.C7 U1.E1 U2.3 | length 17.2
  Top Layer w0.1: TP5.TP@19.55,27.25 20,26.8 20,26.25 v1(19.95,26.2) ; v1@22.9,21.45 22.94,21.49 22.94,22.502 23.289,22.851 U2.3@23.325,22.851
  Top Layer w0.2: v1(19.55,30.15) 20.37,30.97 U1.C7@20.64,30.97 ; U1.A1@23.82,30.01 23.868,29.962 24.712,29.962 v1(24.75,30)
  Bottom Layer w0.1: v1@22.9,21.45 22.9,24.4 22.5,24.8 22.5,26.55 21.85,27.2 21.85,27.75 22.1,28 23.4,28 24.75,29.35 v1(24.75,30) ; v1@24.775,29.975 v1@24.8,30
  Bottom Layer w0.2: C3.1@18.695,29.85 19.196,29.85 19.496,30.15 v1(19.55,30.15)
  other v1: 22.9,21.5 20.55,26.2 22.23,30.97 23.82,31.93
CAMERA_ENABLE: J1.11 R6.1 R8.1 R41.2 | length 21.9
  Top Layer w0.1: v1(7.4,25.55) 7.4,25.95 8.1,26.65 J1.11@9.35,26.65 ; v1(15.1,26.45) 16.605,26.45 R6.1@16.705,26.55 16.695,26.56 R8.1@16.695,27.35
  Mid2 w0.1: v1(7.4,25.55) 8.3,26.45 v1(15.1,26.45)
  Bottom Layer w0.1: v1(7.4,25.55) 8.05,25.55 8.35,25.25 8.35,18.75 8.7,18.4 R41.2@9.405,18.4
CON_CSI_CLK_N: D2.1 D2.10 J1.8 L3.1 | length 4.7
  Top Layer w0.117: J1.8@9.35,29.65 10.05,29.65 10.292,29.408 10.292,29.328 10.36,29.259 10.507,29.259 11.337,29.259 11.406,29.328 11.406,29.333 11.472,29.4 11.597,29.4 11.722,29.4 11.789,29.333 11.789,29.328 11.857,29.259 12.137,29.259 12.206,29.328 12.206,29.333 12.272,29.4 12.397,29.4 12.522,29.4 12.589,29.333 12.589,29.328 12.657,29.259 12.955,29.259 13.165,29.259 13.233,29.328 13.233,29.333 13.3,29.4 L3.1@13.55,29.4
CON_CSI_CLK_P: D2.2 D2.9 J1.9 L3.4 | length 4.7
  Top Layer w0.117: J1.9@9.35,28.65 10.05,28.65 10.292,28.892 10.292,28.972 10.36,29.041 10.598,29.041 11.337,29.041 11.406,28.972 11.406,28.967 11.472,28.9 11.597,28.9 11.722,28.9 11.789,28.967 11.789,28.972 11.857,29.041 12.137,29.041 12.206,28.972 12.206,28.967 12.272,28.9 12.397,28.9 12.522,28.9 12.589,28.967 12.589,28.972 12.657,29.041 12.864,29.041 13.165,29.041 13.233,28.972 13.233,28.967 13.3,28.9 L3.4@13.55,28.9
CON_CSI_D0_N: D1.1 D1.10 J1.2 L1.1 | length 5.1
  Top Layer w0.117: J1.2@9.35,35.65 10.05,35.65 10.292,35.408 10.292,35.328 10.36,35.259 10.598,35.259 11.073,34.784 11.073,34.578 11.142,34.509 11.34,34.509 11.408,34.578 11.408,34.583 11.475,34.65 D1.1@11.6,34.65 11.725,34.65 11.792,34.583 11.792,34.578 11.86,34.509 12.14,34.509 12.208,34.578 12.208,34.583 12.275,34.65 D1.10@12.4,34.65 12.525,34.65 12.592,34.583 12.592,34.578 12.66,34.509 12.955,34.509 12.957,34.508 13.164,34.508 13.233,34.576 13.233,34.582 13.299,34.648 L1.1@13.549,34.648
CON_CSI_D0_P: D1.2 D1.9 J1.3 L1.4 | length 5.1
  Top Layer w0.117: J1.3@9.35,34.65 10.05,34.65 10.292,34.892 10.292,34.972 10.36,35.041 10.507,35.041 10.854,34.693 10.854,34.487 11.051,34.291 11.34,34.291 11.408,34.222 11.408,34.217 11.475,34.15 D1.2@11.6,34.15 11.725,34.15 11.792,34.217 11.792,34.222 11.86,34.291 12.14,34.291 12.208,34.222 12.208,34.217 12.275,34.15 D1.9@12.4,34.15 12.525,34.15 12.592,34.217 12.592,34.222 12.66,34.291 12.864,34.291 12.866,34.289 13.164,34.289 13.233,34.22 13.233,34.215 13.299,34.148 L1.4@13.549,34.148
CON_CSI_D1_N: D1.4 D1.7 J1.5 L2.1 | length 5.1
  Top Layer w0.117: J1.5@9.35,32.65 10.05,32.65 10.292,32.408 10.292,32.328 10.36,32.259 10.507,32.259 10.888,32.64 10.888,32.813 11.084,33.009 11.34,33.009 11.408,33.078 11.408,33.083 11.475,33.15 D1.4@11.6,33.15 11.725,33.15 11.792,33.083 11.792,33.078 11.86,33.009 12.14,33.009 12.208,33.078 12.208,33.083 12.275,33.15 D1.7@12.4,33.15 12.525,33.15 12.592,33.083 12.592,33.078 12.66,33.009 12.861,33.009 12.863,33.011 13.157,33.011 13.225,33.08 13.225,33.085 13.292,33.152 L2.1@13.542,33.152
CON_CSI_D1_P: D1.5 D1.6 J1.6 L2.4 | length 5.1
  Top Layer w0.117: J1.6@9.35,31.65 10.05,31.65 10.292,31.892 10.292,31.972 10.36,32.041 10.598,32.041 11.106,32.549 11.106,32.722 11.175,32.791 11.34,32.791 11.408,32.722 11.408,32.717 11.475,32.65 D1.5@11.6,32.65 11.725,32.65 11.792,32.717 11.792,32.722 11.86,32.791 12.14,32.791 12.208,32.722 12.208,32.717 12.275,32.65 D1.6@12.4,32.65 12.525,32.65 12.592,32.717 12.592,32.722 12.66,32.791 12.951,32.791 12.953,32.793 13.157,32.793 13.225,32.724 13.225,32.719 13.292,32.652 L2.4@13.542,32.652
  Top Layer w0.15: J1.6@9.3,31.6 J1.6@9.312,31.588
CSI_CLK_N: L3.2 U1.D5 | length 11.9
  Top Layer w0.117: L3.2@14.45,29.4 14.517,29.333 14.767,29.333 14.767,29.328 14.835,29.259 15.273,29.259 15.457,29.443 15.457,29.618 v1@15.442,29.633 ; v1@19.916,33.85 19.985,33.85 20.126,33.709 21.675,33.709 21.972,33.413 21.972,31.836 21.716,31.58 21.716,31.466 U1.D5@21.7,31.45
  Bottom Layer w0.117: v1@15.442,29.633 15.697,29.888 19.503,33.694 19.69,33.694 19.846,33.85 v1@19.916,33.85
  other v1: 15.432,29.643 19.916,33.87
CSI_CLK_P: L3.3 U1.E5 | length 11.7
  Top Layer w0.117: L3.3@14.45,28.9 14.517,28.967 14.767,28.967 14.767,28.972 14.835,29.041 15.363,29.041 15.638,29.315 15.826,29.315 v1@15.834,29.323 ; v1@19.9,33.35 19.97,33.35 20.11,33.49 21.584,33.49 21.753,33.322 21.753,32.005 21.7,31.953 U1.E5@21.7,31.93
  Bottom Layer w0.117: v1@15.834,29.323 15.852,29.341 15.852,29.734 15.916,29.798 16.384,30.266 16.685,30.567 cw(c16.814,30.437) 16.944,30.567 17.039,30.471 ccw(c17.169,30.601) 17.299,30.471 ccw(c17.169,30.601) 17.299,30.731 17.203,30.826 cw(c17.333,30.956) 17.203,31.085 17.78,31.662 19.593,33.475 19.698,33.475 19.823,33.35 v1@19.9,33.35
  other v1: 15.844,29.313 19.9,33.33
CSI_D0_N: L1.2 U1.D4 | length 11.1
  Top Layer w0.117: L1.2@14.449,34.648 17.02,34.648 20.128,34.648 21.993,34.648 22.488,34.153 22.488,31.823 22.246,31.58 22.246,31.466 U1.D4@22.23,31.45
CSI_D0_P: L1.3 U1.E4 | length 11.3
  Top Layer w0.117: L1.3@14.449,34.148 14.699,34.148 14.981,34.429 15.7,34.429 16.125,34.429 cw(c16.125,34.246) 16.309,34.246 16.309,34.181 ccw(c16.492,34.181) 16.492,33.998 ccw(c16.492,34.181) 16.675,34.181 16.675,34.246 cw(c16.859,34.246) 16.859,34.429 cw(c16.859,34.246) 17.042,34.246 17.042,34.181 ccw(c17.226,34.181) 17.226,33.998 ccw(c17.226,34.181) 17.409,34.181 17.409,34.246 cw(c17.592,34.246) 17.592,34.429 18.007,34.429 21.902,34.429 22.27,34.062 22.27,32.028 22.246,32.005 22.246,31.946 U1.E4@22.23,31.93
CSI_D1_N: L2.2 U1.D6 | length 11.1
  Top Layer w0.117: L2.2@14.442,33.152 14.692,33.152 15.149,32.695 15.152,32.695 15.32,32.695 ccw(c15.32,32.878) 15.503,32.878 15.503,32.966 cw(c15.905,32.966) 16.307,32.966 16.307,31.81 ccw(c16.491,31.81) 16.674,31.81 16.674,32.293 cw(c17.076,32.293) 17.076,32.695 17.869,32.695 21.202,32.695 21.428,32.469 21.428,31.823 21.186,31.58 21.186,31.466 U1.D6@21.17,31.45
CSI_D1_P: L2.3 U1.E6 | length 11.1
  Top Layer w0.117: L2.3@14.442,32.652 14.462,32.632 14.902,32.632 15.059,32.476 15.152,32.476 15.32,32.476 ccw(c15.32,32.878) 15.722,32.878 15.722,32.966 cw(c15.905,32.966) 16.089,32.966 16.089,31.81 ccw(c16.491,31.81) 16.893,31.81 16.893,32.293 cw(c17.076,32.293) 17.076,32.476 17.869,32.476 17.875,32.476 18.3,32.476 cw(c18.3,32.293) 18.483,32.293 18.483,31.993 ccw(c18.667,31.993) 18.667,31.809 ccw(c18.667,31.993) 18.85,31.993 18.85,32.293 cw(c19.033,32.293) 19.033,32.476 19.687,32.476 21.111,32.476 21.21,32.378 21.21,32.028 21.186,32.005 21.186,31.946 U1.E6@21.17,31.93
DOVDD: C5.1 C13.1 Q3.2 Q3.5 R1.1 R5.1 R10.2 R11.2 R12.2 R16.2 R22.2 R23.2 R32.2 R63.2 TP2.TP U1.A3 U1.C6 U3.3 U5.1 U5.4 | length 21.7
  Top Layer w0.1: v1@21.384,21.503 21.41,21.529 21.41,22.76 21.501,22.851 U3.3@21.825,22.851 ; v1(30.3,22.15) 30.705,22.555 R23.2@30.705,22.95
  Top Layer w0.15: U1.A3@22.76,30.01 22.77,30 22.77,29.08 v1(22.8,29.05) ; R10.2@26.3,25.8 25.9,25.8 25.8,25.7 v1(25.8,24.3) Q3.2@26.55,24.3 ; Q3.5@28.25,24.3 v1(29,24.3) ; v1(28.45,30.45) 28.45,30.518 28.571,30.639 R12.2@28.571,31.351 ; R11.2@28.55,25.8 R11.2@28.595,25.8 v1(29.3,25.8) v1@29.325,25.825 ; v1(30.1,18.65) R32.2@30.805,18.65 ; C13.1@30.55,30.4 31.1,30.4 ; R63.2@30.75,26.895 R63.2@30.755,26.9 30.755,27.655 31.05,27.95 U5.4@31.05,28.1 ; TP2.TP@31,31.2 31.412,31.2 31.5,31.112 v1(31.5,30.6) ; U5.4@31.225,28.075 U5.1@31.225,29.525 31.2,29.55 31.2,30.3 31.1,30.4 ; R16.2@33.705,29.95 32.15,29.95 v1(31.5,30.6) ; R22.2@37.295,29.95 v1(38.2,29.95) ; 31.1,30.4 31.232,30.4 31.432,30.6 v1(31.5,30.6)
  Mid2 w0.2: v1@22.8,29.008 v1(22.8,29.05)
  Bottom Layer w0.1: R5.1@16.3,27.075 16.3,26.55 v1(17.45,25.4)
  Bottom Layer w0.15: v1(21.17,30.97) 21.17,31.478 21.173,31.48 21.173,31.615 C5.1@21.288,31.73
  other v1: 21.384,21.5 23,26.2 23.6,26.2
DVDD: C4.1 R2.1 TP3.TP U1.A7 U1.D3 U1.E7 | length 5.6
  Top Layer w0.1: TP3.TP@18.7,28.15 18.777,28.227 18.777,28.827 19.204,29.254 v1(19.634,29.254)
  Top Layer w0.2: C4.1@18.695,30.65 18.695,30.68 18.785,30.77 19.299,30.77 20.46,31.93 U1.E7@20.64,31.93 ; v1(19.634,29.254) 19.634,29.3 20.344,30.01 U1.A7@20.64,30.01
  other v1: 21.45,26.2 22.1,26.2 22.69,31.457 20.03,31.5
FSIN_1V8__OUT: J3.1 R29.1 R33.2 | length 13
  Top Layer w0.1: R33.2@28.39,16.85 R29.1@28.39,16.05 28.506,15.934 37.684,15.934 38.7,16.95 38.7,18.29 J3.1@38.64,18.35